# EAGLE board usbDirectController (EAGLE 9.3.1)
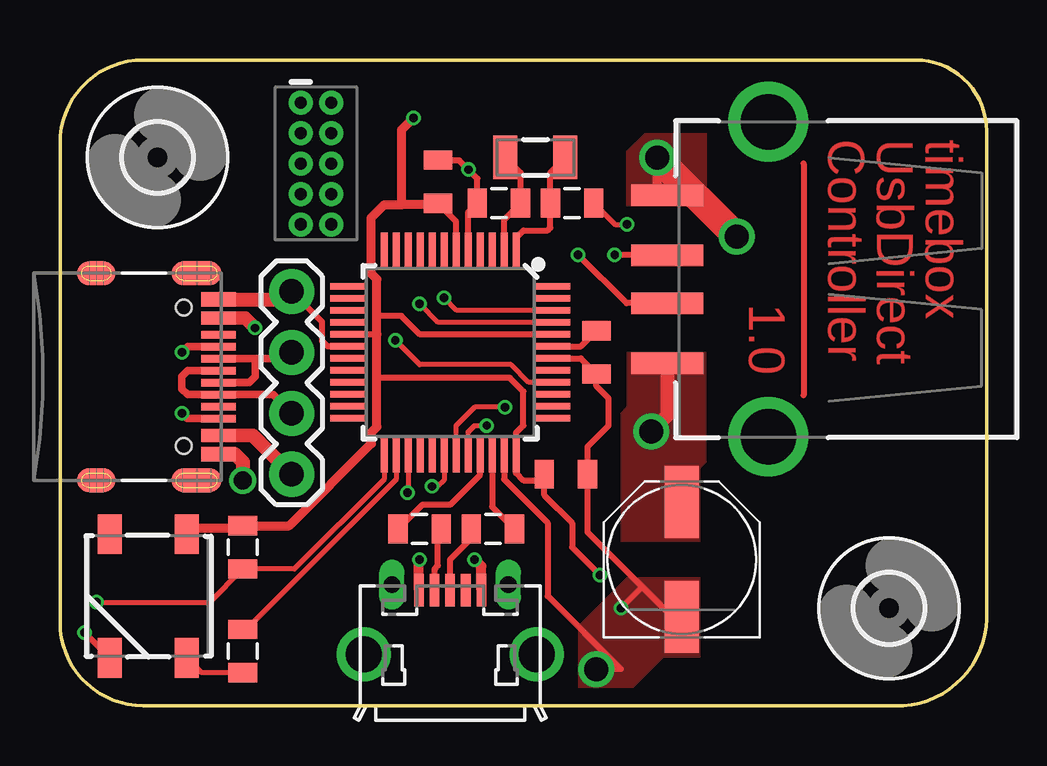
[diagram p0: board, top side]
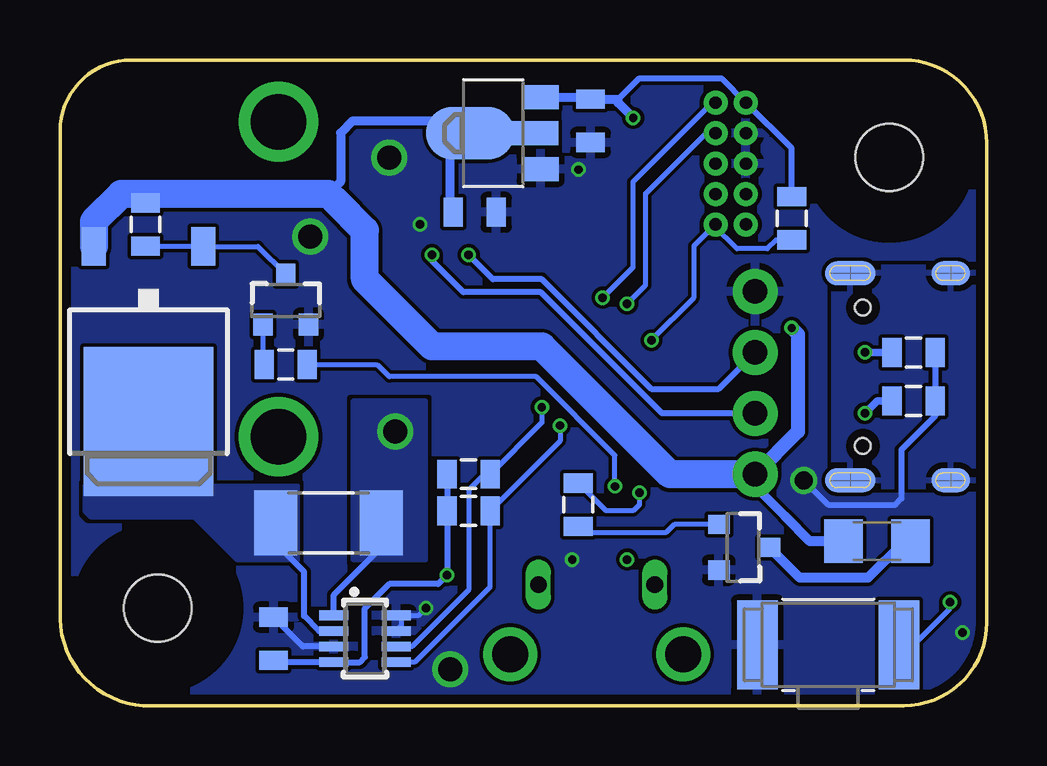
[diagram p1: board, bottom side, seen from below]

Size 38.62 x 26.92 mm. Coordinates in mm from the lower left corner, seen from the top.
Outline: 38.61,3.98 38.61,23.96 arc90 35.65,26.92 3.47,26.92 arc90 0,23.45 0,3.47 arc90 3.47,0 35.14,0 arc90 38.61,3.98
Copper layers (1*16): Top 0.035559375mm / dielectric 1.6mm / Bottom 0.035559375mm
Design rules "oshpark-2layer": minimum track width 6mil, minimum drill 10mil, track to track 6mil, track to pad 6mil, pad to pad 6mil, via to via 6mil, smd to smd 6mil, copper to edge 15mil, drill to drill 6mil, minimum pad ring 5mil, minimum via ring 5mil, stop-mask expansion 2.5mil, vias tented up to drill 0mil, thermal gap 10mil
Net classes: 0 default: width 0.203 mm, clearance 0.152 mm; 1 power: width 0.254 mm, clearance 0.203 mm; 3 usbsignal: width 0.254 mm, clearance 0.203 mm; 4 highpower: clearance 0.305 mm

## Footprints (pad centres in the part's own frame; a part is rotated, then mirrored left to right if it is on the bottom)
0805 = smd 0.8 x 1.2: 1 -0.9,0; 2 0.9,0
PANASONIC_D = smd 3 x 1.4: + 2.4,0; - -2.4,0
WS2812B = smd 1.651 x 1: 1 -2.577,1.6; 2 -2.577,-1.6; 3 2.577,-1.6; 4 2.577,1.6
2,8 = hole 2.8: 0,0
SOT89 = smd 1 x 1.5: 1 -1.499,-1.981; 3 1.499,-1.981 | smd 1 x 2: 2 0,-1.727 | smd 2.2 x 3.7: 2@1 0,0.94
USB-C-16P = smd 0.3 x 1.45: A5 -1.25,0; A6 -0.25,0; A7 0.25,0; A8 1.25,0; B5 1.75,0; B6 0.75,0; B7 -0.75,0; B8 -1.75,0 | smd 0.6 x 1.45: GND -3.225,0; GND2 3.225,0 | smd 1 x 2.1: SHLD1 -4.32,-0.915; SHLD2 4.32,-0.915 | smd 1 x 2.1 bottom: SHLD3 -4.32,-0.915; SHLD4 4.32,-0.915 | smd 1 x 1.6: SHLD5 -4.32,-5.095; SHLD8 4.32,-5.095 | smd 1 x 1.6 bottom: SHLD6 -4.32,-5.095; SHLD7 4.32,-5.095 | smd 0.55 x 1.45: VBUS1 -2.45,0; VBUS2 2.45,0 | hole 0.65: -2.89,-1.445; 2.89,-1.445
1X04 = drill 1.016 pad 1.88: 1 0,0; 2 2.54,0; 3 5.08,0; 4 7.62,0
2X5-PTH-1.27MM = drill 0.508 pad 1: 1 -2.54,-0.635; 2 -2.54,0.635; 3 -1.27,-0.635; 4 -1.27,0.635; 5 0,-0.635; 6 0,0.635; 7 1.27,-0.635; 8 1.27,0.635; 9 2.54,-0.635; 10 2.54,0.635
TO252 = smd 1 x 1.6: 1 -2.28,-4.8; 2 2.28,-4.8 | smd 5.4 x 6.2: 3 0,2.5
SOT23-3 = smd 0.8 x 0.9: 1 -0.95,-1; 2 0.95,-1; 3 0,1.1
R2010 = smd 1.8 x 2.7: 1 -2.2,0; 2 2.2,0
1206 = smd 1.6 x 1.8: 1 -1.4,0; 2 1.4,0
BTN_CK_KSS = smd 1.7 x 3.7: P$1 -2.95,0; P$2 2.95,0
TQFP-48 = smd 1.5 x 0.28: 1 -4.25,2.75; 2 -4.25,2.25; 3 -4.25,1.75; 4 -4.25,1.25; 5 -4.25,0.75; 6 -4.25,0.25; 7 -4.25,-0.25; 8 -4.25,-0.75; 9 -4.25,-1.25; 10 -4.25,-1.75; 11 -4.25,-2.25; 12 -4.25,-2.75; 25 4.25,-2.75; 26 4.25,-2.25; 27 4.25,-1.75; 28 4.25,-1.25; 29 4.25,-0.75; 30 4.25,-0.25; 31 4.25,0.25; 32 4.25,0.75; 33 4.25,1.25; 34 4.25,1.75; 35 4.25,2.25; 36 4.25,2.75 | smd 0.28 x 1.5: 13 -2.75,-4.25; 14 -2.25,-4.25; 15 -1.75,-4.25; 16 -1.25,-4.25; 17 -0.75,-4.25; 18 -0.25,-4.25; 19 0.25,-4.25; 20 0.75,-4.25; 21 1.25,-4.25; 22 1.75,-4.25; 23 2.25,-4.25; 24 2.75,-4.25; 37 2.75,4.25; 38 2.25,4.25; 39 1.75,4.25; 40 1.25,4.25; 41 0.75,4.25; 42 0.25,4.25; 43 -0.25,4.25; 44 -0.75,4.25; 45 -1.25,4.25; 46 -1.75,4.25; 47 -2.25,4.25; 48 -2.75,4.25
SOT23-8 = smd 0.4 x 1.2: 1 -0.975,-1.3; 2 -0.325,-1.3; 3 0.325,-1.3; 4 0.975,-1.3; 5 0.975,1.3; 6 0.325,1.3; 7 -0.325,1.3; 8 -0.975,1.3
USB-A-S-SILK-FEMALE = smd 3 x 0.9: D+ 7.212,-1; D- 7.212,1; GND 7.212,-3.5; VBUS 7.212,3.5 | drill 2.311: SHLD1 3,-6.566; SHLD2 3,6.566
ZX62D-B-5PA8 = smd 1.35 x 0.4: 1 4.825,1.3; 2 4.825,0.65; 3 4.825,0; 4 4.825,-0.65; 5 4.825,-1.3 | drill 1.5: S1 2.15,-3.6; S2 2.15,3.6 | drill 0.7 long: S3 5.05,2.425; S4 5.05,-2.425
CRYSTAL-SMD-3.2X1.5MM = smd 1 x 1.8: P$1 -1.25,0; P$2 1.25,0

## Placement (x,y rotation side)
C1  1.0uF  [0805]  29.72,2.79 270 bottom
C2  0.1uF  [0805]  21.08,9.65 180 top
C3  0.1uF  [0805]  15.75,21.84 270 top
C4  22pF  [0805]  21.34,20.95 180 top
C5  22pF  [0805]  18.29,20.95 0 top
C6  0.1uF  [0805]  22.35,14.73 270 top
C7  1.0uF  [0805]  21.34,20.57 0 bottom
C8  1.0uF  [0805]  16.51,24.38 270 bottom
C9  100uF  [PANASONIC_D]  25.91,6.1 90 top
D2  [WS2812B]  3.68,4.57 270 top
H5  MOUNT-HOLE2.8  [2,8]  34.54,4.06 0 top
H8  MOUNT-HOLE2.8  [2,8]  4.06,22.86 0 top
IC1  MCP170312MB  [SOT89]  20.57,23.88 90 bottom
J1  [USB-C-16P]  6.6,13.72 270 top
J3  [1X04]  9.65,17.27 270 top
J5  CORTEX_DEBUG_PTH  [2X5-PTH-1.27MM]  10.67,22.61 270 top
Q3  [TO252]  34.92,14.35 180 bottom
Q4  200mA/50V  [SOT23-3]  29.21,16.89 0 bottom
Q8  200mA/50V  [SOT23-3]  10.16,6.6 270 bottom
R1  ?  [R2010]  27.43,7.62 0 bottom
R2  1k  [0805]  17.02,8.38 270 bottom
R3  5.1k  [0805]  14.99,7.37 0 top
R4  10k  [0805]  35.05,20.07 270 bottom
R5  [0805]  7.62,6.6 270 top
R6  1k  [0805]  29.21,14.22 180 bottom
R7  5.1k  [0805]  18.03,7.37 180 top
R13  5.1k  [0805]  3.05,12.7 180 bottom
R14  5.1k  [0805]  3.05,14.73 180 bottom
R_DLOAD  1k  [1206]  4.57,6.86 180 bottom
R_LED  4.7k  [0805]  7.62,2.29 270 top
RPU1  10k  [0805]  21.59,8.13 180 bottom
RPU2  10k  [0805]  21.59,9.65 0 bottom
RRST1  [0805]  8.13,20.32 90 bottom
SW1  KSS221GLFS  [BTN_CK_KSS]  6.6,2.54 0 bottom
U1  ATSAMD21G-A  [TQFP-48]  16.26,14.73 270 top
U2  INA219BIDCNT  [SOT23-8]  25.91,2.79 270 bottom
USB_1  USB_A_SMT_FEMALE  [USB-A-S-SILK-FEMALE]  32.51,17.78 180 top
X2  ZX62D-B-5PA8  [ZX62D-B-5PA8]  16.26,0 90 top
Y2  32.768kHz  [CRYSTAL-SMD-3.2X1.5MM]  19.81,22.86 0 top

## Library data of the parts
C1-C3 C6-C8 = SparkFun-Capacitors; PROD_ID: CAP-08064
C4 C5 R1 R3 R5 R7 R13 R14 RPU1 RPU2 RRST1 = SparkFun-Passives
C9 = SparkFun-Capacitors; PROD_ID: CAP-12547
D2 = SparkFun-LED; PROD_ID: DIO-12503
H5 H8 = holes
IC1 = linear
J1 = SparkFun-Connectors; PROD_ID: CONN-14122
J3 = SparkFun-Connectors; PROD_ID: CONN-09696
J5 = SparkFun-Connectors
Q3 = transistor-fet
Q4 Q8 = SparkFun-DiscreteSemi; PROD_ID: TRANS-00830
R2 R4 R6 R_DLOAD R_LED = SparkFun-Resistors
SW1 = adafruit
U1 = SparkFun-IC-Microcontroller; PROD_ID: IC-13064
U2 = microbuilder
USB_1 = SparkFun-Connectors; PROD_ID: CONN-09520; SF_ID: PRT-09011
X2 = zx62d-b-5pa8-oshpark_10; MF: Hirose; MPN: ZX62D-B-5PA8; OC_FARNELL: 2300438; OC_NEWARK: 69W0712
Y2 = samd21-temp; PROD_ID: XTAL-13062

## Nets
BTN: R5.2 SW1.P$2 U1.25
CC1: J1.A5 R14.2
CC2: J1.B5 R13.2
DM: J1.A7 J1.B7 J3.2 USB_1.D-
DP: J1.A6 J1.B6 J3.3 USB_1.D+
DUMMY_LOAD: R2.1 U1.27
GND: C1.1 C2.1 C3.1 C4.1 C5.1 C6.2 C7.2 C8.2 C9.- D2.3 IC1.1 J1.GND J1.GND2 J3.1 J5.3 J5.5 Q4.2 Q8.2 R13.1 R14.1 SW1.P$1 U1.5 U1.18 U1.35 U1.42 U2.3 U2.7 U2.8 USB_1.GND X2.5
LED: R_LED.1 U1.26
MICRO_DM: R3.1 U1.33
MICRO_DP: R7.1 U1.34
MICRO_VBUS: X2.1
MOSFET_OUT [power]: Q3.3 R1.1 U2.2
N$1: C6.1 U1.43
N$2: Q4.1 R6.2
N$3: Q3.1 Q4.3 R4.2
N$6: R3.2 X2.2
N$7: D2.4 R_LED.2
N$8: C4.2 U1.1 Y2.P$2
N$9: R7.2 X2.3
N$10: Q8.1 R2.2
N$11: Q8.3 R_DLOAD.1
N$32: C5.2 U1.2 Y2.P$1
OUT_5V [power]: C9.+ R1.2 U2.1 USB_1.VBUS
RESET: J5.10 RRST1.1 U1.40
SCL: RPU1.1 U1.32 U2.5
SDA: RPU2.2 U1.31 U2.6
SHLD: J1.SHLD1 J1.SHLD2 J1.SHLD3 J1.SHLD4 J1.SHLD5 J1.SHLD6 J1.SHLD7 J1.SHLD8
SWDCLK: J5.4 U1.45
SWDIO: J5.2 U1.46
USB_5V [highpower]: C7.1 IC1.2@1 J1.VBUS1 J1.VBUS2 J3.4 Q3.2 R4.1 R_DLOAD.2
USB_EN: R6.1 U1.30
VCC [power]: C1.2 C2.2 C3.2 C8.1 D2.1 IC1.3 J5.1 R5.1 RPU1.2 RPU2.1 RRST1.2 U1.6 U1.17 U1.36 U1.44 U2.4

## Tracks (layer width: path | path; a pad name or v marks a point on that pad's centre or on a via)
BTN  (via drill 0.35)
  Top 0.203: v1.52,4.32 6.23,4.32 R5.2 9.77,5.7 13.51,9.44 U1.25
  Bottom 0.203: SW1.P$2 3.05,2.54 1.52,4.06 v1.52,4.32
CC1  (via drill 0.35)
  Top 0.305: J1.A5 5.31,14.97 v5.08,14.73
  Bottom 0.305: v5.08,14.73 R14.2
CC2  (via drill 0.35)
  Top 0.305: J1.B5 5.31,11.97 v5.08,12.19
  Bottom 0.305: v5.08,12.19 4.57,12.7 R13.2
DM  (via drill 0.35)
  Top 0.254: USB_1.D- 23.61,16.78 v21.59,18.8
  Top 0.305: J3.2 9.39,14.47 8.13,14.47 | J1.B7 8.13,14.47 | J1.A7 7.88,13.47 8.13,13.72 8.13,14.47
  Bottom 0.254: J3.2 11.18,13.21 13.97,13.21 18.54,17.78 20.57,17.78 v21.59,18.8
DP  (via drill 0.35)
  Top 0.254: USB_1.D+ 25.28,18.8 v23.11,18.8
  Top 0.305: J3.3 8.88,12.97 J1.B6 5.32,12.97 5.08,13.21 5.08,13.72 5.33,13.97 J1.A6
  Bottom 0.254: J3.3 13.53,12.19 18.57,17.24 21.81,17.24 23.11,18.54 v23.11,18.8
DUMMY_LOAD  (via drill 0.35)
  Top 0.203: U1.27 14.51,8.92 arc-90 v14.48,8.89
  Bottom 0.203: v14.48,8.89 14.48,8.38 14.73,8.13 15.86,8.13 R2.1
GND  (via drill 0.35, 0.75, 1)
  Top 0.203: C4.1 23.12,20.07 v23.62,20.07 | v23.37,4.06 24.26,4.95
  Top 0.254: D2.3 v1.03,3.05 v1.02,3.05 | J3.1 10.93,16 10.93,15.21 11.15,14.98 U1.18 | U1.42 21.7,14.48 C6.2 22.35,13.32 22.86,12.82 22.86,11.68 21.98,10.81 C2.1 21.98,7.23 24.26,4.95 25.51,3.7 C9.- 25.54,4.06 | U1.35 18.51,9.44 20.32,7.63 20.32,4.57 23.37,1.52 v22.35,1.52 | U1.5 17.01,20.57 C5.1 17.39,21.98 v17.02,22.35 16.64,22.73 C3.1
  Top 0.381: USB_1.GND 24.89,21.69 v24.89,22.86
  Top 0.406: X2.5 17.56,5.81 v17.27,6.1
  Top 0.559: J1.GND2 7.29,10.49
  Top 0.584: J1.GND 9.32,16.94 J3.1 | 7.29,10.49 7.62,10.16 v7.62,9.4
  Top 1.168: v24.89,22.86 v28.19,19.56
  Bottom 0.203: U2.8 24.38,3.77 | 24.38,3.77 23.66,3.77 v23.37,4.06 | U2.7 24.38,3.34 24.38,3.77
  Bottom 0.254: R14.1 R13.1 2.15,12.08 3.56,10.67 3.56,8.64 3.81,8.38 6.6,8.38 v7.62,9.4 | U2.3 28.49,2.47 C1.1
  pour Bottom (rank 2): 0,0 38.61,0 38.61,26.42 38.61,26.92 0,26.92
  pour Top (no thermals): 26.92,20.83 23.62,20.83 23.62,23.11 24.38,23.88 26.92,23.88
  pour Top (no thermals): 26.67,5.33 23.62,5.33 21.59,3.3 21.59,0.76 23.88,0.76 25.15,2.03 26.67,2.03
LED
  Top 0.203: U1.26 14.01,9.43 7.76,3.19 R_LED.1
MICRO_DM
  Top 0.254: R3.1 15.1,8.38 16.26,8.38 17.51,9.63 U1.33
MICRO_DP
  Top 0.254: U1.34 18.01,8.29 R7.1
MICRO_VBUS  (via drill 0.35)
  Top 0.406: X2.1 14.96,6.1 v14.99,6.1
MOSFET_OUT
  Bottom 0.254: R1.1 29.63,6.77 28.45,5.59 28.45,3.74 27.82,3.12 U2.2
  pour Bottom (no thermals): 37.59,9.14 37.59,8.13 37.34,7.87 33.02,7.87 31.24,6.1 28.7,6.1 28.7,9.14
N$1
  Top 0.254: U1.43 21.7,14.98 C6.1
N$2
  Bottom 0.203: Q4.1 30.16,14.27 R6.2
N$3
  Bottom 0.203: Q4.3 30.37,19.15 Q3.1 35.04,19.15 R4.2
N$4
  Top 0.254: 30.99,22.61 30.99,12.95
N$6
  Top 0.254: X2.2 15.61,5.7 15.75,5.84 15.75,7.23 R3.2
N$7
  Top 0.203: D2.4 5.89,1.39 R_LED.2
N$8
  Top 0.254: U1.1 19.01,19.51 19.3,19.81 20.32,19.81 20.44,19.93 C4.2 20.44,22.23 Y2.P$2
N$9
  Top 0.254: X2.3 16.26,6.1 17.13,6.97 R7.2
N$10
  Bottom 0.203: Q8.1 13.02,7.55 13.35,7.23 16.53,7.23 R2.2
N$11
  Bottom 0.406: R_DLOAD.1 3.43,6.86 4.95,5.33 7.79,5.33 Q8.3
N$32
  Top 0.254: U1.2 18.51,20.27 C5.2 19.19,22.23 Y2.P$1
OUT_5V  (via drill 1)
  Top 0.584: USB_1.VBUS 25.3,12.09 v24.64,11.43
  Bottom 0.254: U2.1 27.21,4.63 25.23,6.6
  Bottom 0.381: 25.23,6.51 25.23,6.6 R1.2
  pour Top (no thermals): 26.92,14.73 23.62,14.73 23.62,12.45 23.37,12.19 23.37,6.86 26.67,6.86 26.67,9.91 26.92,10.16
  pour Bottom (no thermals): 26.42,6.1 23.37,6.1 23.37,12.7 26.42,12.7
RESET  (via drill 0.35)
  Top 0.203: U1.40 19.54,13.48 18.8,14.22 14.99,14.22 v13.97,15.24
  Bottom 0.203: v13.97,15.24 12.19,17.02 12.19,19.18 11.37,20 | 11.37,20 J5.10 | RRST1.1 8.77,19.42 9.14,19.05 10.41,19.05 11.37,20
SCL  (via drill 0.35)
  Top 0.203: U1.32 17.01,11.42 17.27,11.68 v17.78,11.68
  Bottom 0.203: v17.78,11.68 17.78,11.04 RPU1.1 20.69,4.96 23.84,1.82 U2.5
SDA  (via drill 0.35)
  Top 0.203: U1.31 16.51,11.68 17.27,12.45 v18.54,12.45
  Bottom 0.203: U2.6 23.95,2.47 21.59,4.83 21.59,9.01 20.94,9.65 RPU2.2 18.54,11.8 v18.54,12.45
SHLD
  pour Bottom: 0,9.14 6.35,9.14 6.35,18.29 0,18.29
SWDCLK  (via drill 0.35)
  Top 0.203: U1.45 15.77,15.98 v14.99,16.76
  Bottom 0.203: v14.99,16.76 14.22,17.53 14.22,21.34 11.68,23.88 J5.4
SWDIO  (via drill 0.35)
  Top 0.203: U1.46 16.54,16.48 v16,17.02
  Bottom 0.203: v16,17.02 14.73,18.29 14.73,21.84 11.43,25.15 J5.2
USB_5V  (via drill 0.35)
  Top 0.559: J1.VBUS2 8.04,11.27 | J1.VBUS1 7.71,16.17 v8.13,15.75
  Top 0.584: 8.04,11.27 J3.4
  Bottom 0.381: J3.4 9.65,9.14 8.38,7.87 | R4.1 35.42,21.34 36.07,21.34 | 22.35,23.88 IC1.2@1 | C7.1 22.35,20.69 22.35,23.88 | 22.35,23.88 22.35,24.38 26.42,24.38 26.92,23.88 26.92,21.84 27.43,21.34 27.18,21.08
  Bottom 0.406: R_DLOAD.2 7.37,6.86 8.38,7.87
  Bottom 0.584: v8.13,15.75 7.87,15.49 7.87,11.43 J3.4
  Bottom 1.168: J3.4 13.21,9.65 18.54,14.99 23.11,14.99 25.91,17.78 25.91,19.81 27.18,21.08 | 27.43,21.34 36.07,21.34 37.2,20.2 Q3.2
USB_EN  (via drill 0.35)
  Top 0.203: U1.30 16.01,9.4 15.75,9.14 v15.49,9.14
  Bottom 0.203: R6.1 25.4,14.22 24.89,13.72 18.77,13.72 15.49,10.44 v15.49,9.14
VCC  (via drill 0.35)
  Top 0.254: D2.1 5.54,7.4 | 7.52,7.4 R5.1 | v22.49,5.45 21.34,6.6 21.34,7.62 20.18,8.77 20.18,9.4 | U1.6 16.51,20.19 15.81,20.89 C3.2 | 13.21,15.48 U1.17 | 20.18,9.4 C2.2 | 13.21,13.72 13.26,13.66 18.75,13.66 19.3,13.11 19.3,11.68 19.01,11.39 U1.36 19.01,9.7 19.3,9.4 20.18,9.4 | U1.44 15,15.48 14.22,16.26 13.21,16.26
  Top 0.381: 7.52,7.4 5.54,7.4 | R5.1 9.55,7.5 12.97,10.93 12.97,11.39 13.21,11.63 13.21,13.72 13.21,15.48 13.21,16.26 13.21,17.78 12.95,18.03 12.95,20.32 13.52,20.89 14.22,20.89 | v14.73,24.51 14.22,24 14.22,20.89 | 15.81,20.89 14.22,20.89
  Bottom 0.254: RPU2.1 RPU1.2 v22.49,5.45 22.86,5.08 24.89,5.08 25.91,4.06 25.91,2.03 26.12,1.82 U2.4 29.64,1.82 C1.2 | C8.1 16.6,25.38 | 15.36,25.28 14.48,26.16 11.05,26.16 J5.1 8.13,23.24 RRST1.2
  Bottom 0.381: IC1.3 16.6,25.38 | C8.1 15.36,25.28 15.36,25.14 v14.73,24.51

## Text on the board
Top: Controller | UsbDirect | timebox | 1.0